# Altium PCB ESP32_pcb.PcbDoc
Units mil, origin at the board's own origin, x right, y up, seen from the top; angles counter-clockwise.
Board outline 1301 x 2153 mil, 2 copper layers (Top Layer, Bottom Layer); 45 components, 36 nets, 187 pads, 24 vias.
Unrouted connection lines stored in the file: 1.
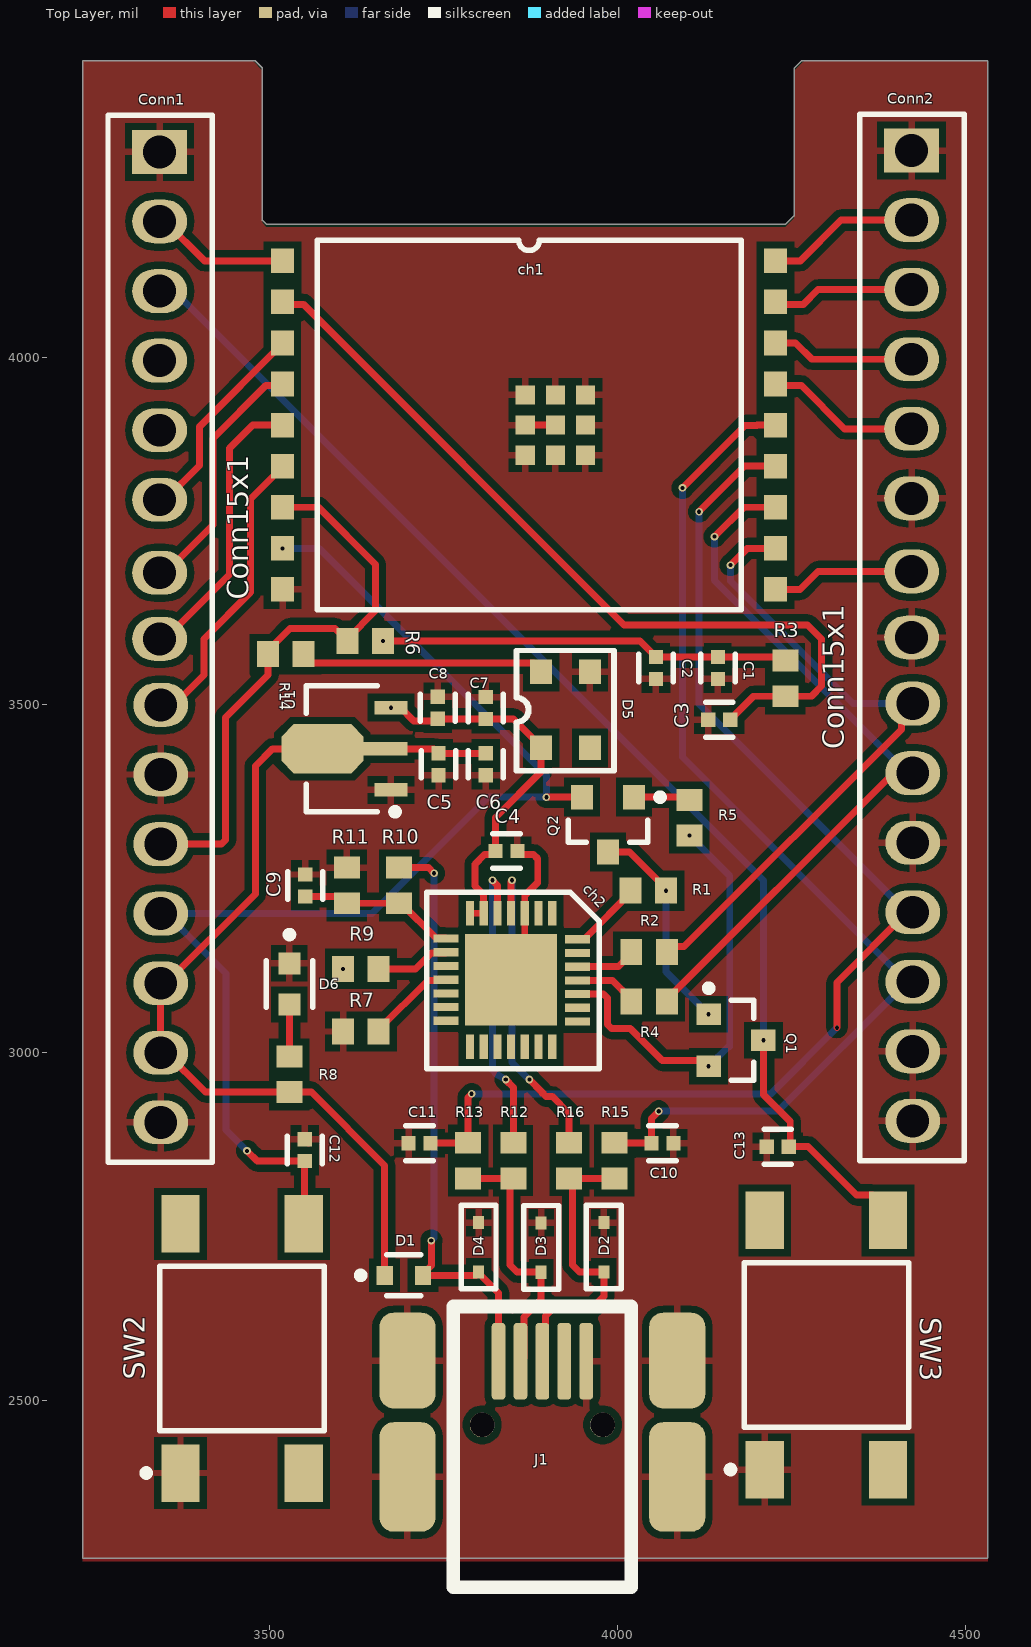
[diagram p0: Top Layer view]
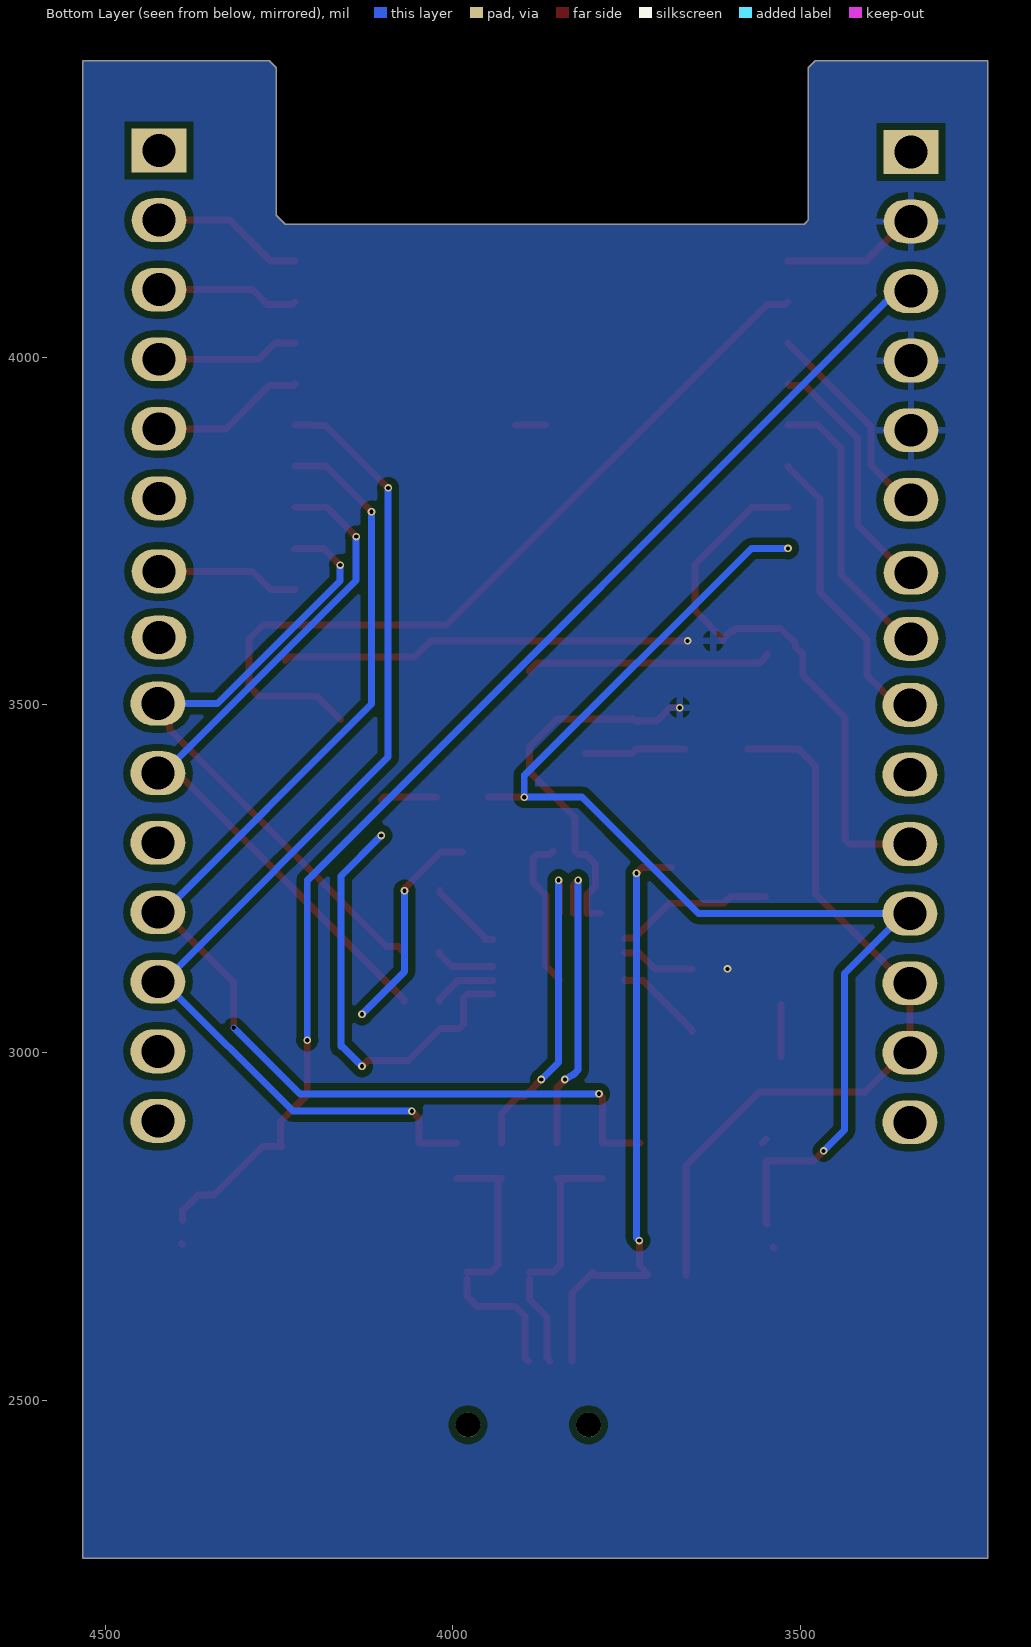
[diagram p1: Bottom Layer view, seen from below]

## Layer stack, top to bottom
Top Solder: solder mask 0.4, Solder Resist, Dk 3.5
Top Layer: signal copper 1.4
Dielectric 1: dielectric 12.6, FR-4, Dk 4.8
Bottom Layer: signal copper 1.4
Bottom Solder: solder mask 0.4, Solder Resist, Dk 3.5

## Board outline
3231,2457 3231,4426 3479,4426 3489,4416 3489,4197 3495,4191 4241,4191 4254,4204 4254,4416 4264,4426 4532,4426 4532,2273 3231,2273

## Design rules (kind name [scope] priority, off if disabled: settings)
Clearance [All] p1: gap=10 ignorepadtopadclearanceinfootprint=FALSE except(0: Arc-Arc Arc-Track Arc-SMDPad Arc-Hole Track-Track Track-SMDPad Track-Hole SMDPad-Hole THPad-Hole Via-Hole Fill-Hole Poly-Hole Region-Hole Text-Hole; 2: SMDPad-SMDPad)
HoleToHoleClearance [All] p1: gap=5 allowstackedmicrovias=TRUE
MinimumSolderMaskSliver [All] p1: minsoldermaskwidth=5
PolygonConnect [All] p1: connectstyle=Relief reliefconductorwidth=10 reliefentries=4 polygonreliefangle="90 Angle" airgapwidth=10
RoutingVias [All] p1: holewidth=6 width=11 viastyle="Through Hole" minholewidth=6 minwidth=11 maxholewidth=6 maxwidth=11
SilkToSilkClearance [All] p1: silktosilkclearance=5
SilkToSolderMaskClearance [IsPad] p1: minsilkscreentomaskgap=2 clearancetoexposedcopper=FALSE
SolderMaskExpansion [All] p1: expansion=4 istentingtop=FALSE
Width [All] p1: maxlimit=10 minlimit=10 preferedwidth=10
26 further rules are at their usual default settings.

## Components (designator, comment, footprint, x,y, rotation, side; value= is the part's Value field where it differs from the comment)
C1 "1p" FP-C0402-BB-MFG 4144,3553.18 r270 top value="0.10 μF"
C2 "1p" FP-C0402-BB-MFG 4054.96,3553.18 r270 top value="0.10 μF"
C3 "1p" FP-C0402-BB-MFG 4146,3478.8 r0 top value="0.10 μF"
C4 "1p" FP-C0402-BB-MFG 3840,3290 r0 top value="0.10 μF"
C5 "1p" FP-C0402-BB-MFG 3742.42,3414.75 r270 top value="0.10 μF"
C6 "1p" FP-C0402-BB-MFG 3810.3,3414.75 r270 top value="0.10 μF"
C7 "1p" FP-C0402-BB-MFG 3810.3,3495.62 r90 top value="0.10 μF"
C8 "1p" FP-C0402-BB-MFG 3741.42,3496 r90 top value="0.10 μF"
C9 "1p" FP-C0402-BB-MFG 3550.71,3240.54 r90 top value="0.10 μF"
C10 "1p" FP-C0402-BB-MFG 4064.25,2870 r0 top value="0.10 μF"
C11 "1p" FP-C0402-BB-MFG 3715,2870 r180 top value="0.10 μF"
C12 "1p" FP-C0402-BB-MFG 3550,2860 r270 top value="0.10 μF"
C13 "1p" FP-C0402-BB-MFG 4230,2865 r0 top value="0.10 μF"
ch1 "ESP_RF" "ESP_RF - DUPLICATE" 3872.51,3902.31 r0 top
ch2 "CP02102" ESPCHIP 3846.65,3105.04 r270 top
Conn1 "Conn15x1" CONN15X1 3342.21,3597.5 r0 top
Conn2 "Conn15x1" CONN15X1 4423.21,3599.5 r0 top
D1 "1N4148WT-" FP-SOD523-MFG 3692.44,2680 r0 top
D2 "zenerDiode" LESD5D5 3980,2720.43 r270 top
D3 "zenerDiode" LESD5D5 3890,2720 r270 top
D4 "zenerDiode" LESD5D5 3800,2720.43 r270 top
D5 "SK68XX" SD68XX 3925,3493 r90 top
D6 "LTST-C190GKT" FP-LTST-C190GKT-MFG 3528,3099 r270 top
J1 "67503-1020" MOLX-67503-1020_V 3828.62,2556.53 r90 top
Q1 "MMBTA42LT1G" ONSC-SOT-23-3-318-08_V 4170,3018 r0 top
Q2 "MMBTA42LT1G" ONSC-SOT-23-3-318-08_V 3986,3328 r270 top
R1 "1k" RESC1609X50X30NL8T20 4044,3233 r0 top
R2 "1k" RESC1609X50X30NL8T20 4045,3145 r0 top
R3 "1k" RESC1609X50X30NL8T20 4241,3538.11 r90 top
R4 "1k" RESC1609X50X30NL8T20 4045,3073.97 r0 top
R5 "1k" RESC1609X50X30NL8T20 4103,3338 r90 top
R6 "1k" RESC1609X50X30NL8T20 3637,3592.1 r0 top
R7 "1k" RESC1609X50X30NL8T20 3630.71,3030.54 r180 top
R8 "1k" RESC1609X50X30NL8T20 3528,2969 r90 top
R9 "1k" RESC1609X50X30NL8T20 3630.71,3120.54 r180 top
R10 "1k" RESC1609X50X30NL8T20 3685.71,3240.54 r270 top
R11 "1k" RESC1609X50X30NL8T20 3610.71,3240.54 r270 top
R12 "1k" RESC1609X50X30NL8T20 3850,2845 r270 top
R13 "1k" RESC1609X50X30NL8T20 3785,2845 r270 top
R14 "1k" RESC1609X50X30NL8T20 3522.66,3573 r180 top
R15 "1k" RESC1609X50X30NL8T20 3995,2845 r270 top
R16 "1k" RESC1609X50X30NL8T20 3930,2845 r270 top
SW2 "FSM4JSMA" TECO-FSM4JSMA_V 3460,2575 r180 top
SW3 "FSM4JSMA" TECO-FSM4JSMA_V 4300,2580 r180 top
U1 "L79L05ACUTR" SOT-89_L 3607,3437.01 r180 top

## Footprints (in the part's own frame and the unit in brackets; to place one, negate y for a bottom-side part, rotate by r counter-clockwise, add the part's x,y. Pads: shape width x height; smd on the part's side, far side on the other; paste and mask are expansions set on the pad)
CONN15X1 [mm]
  rect 2x1.6 hole 1.2: 1(-0.02,17.716)
  oval 2x1.6 hole 1.2: 2(-0.02,15.176) 3(-0.02,12.636) 4(-0.02,10.096) 5(-0.02,7.556) 6(-0.02,5.016) 7(-0.02,2.349) 8(-0.02,-0.064) 9(0.02,-2.476) 10(0.02,-5.016) 11(0.02,-7.556) 12(0.02,-10.096) 13(0.02,-12.636) 14(0.02,-15.176) 15(0.02,-17.716)
  silkscreen extent -1.91,-19.18 1.91,19.05, body extent -1.29,-19.11 1.25,18.99, height 3.2
"ESP_RF - DUPLICATE" [mm]
  rect 0.85x0.9 smd: 1(-9,6) 2(-9,4.5) 3(-9,3) 4(-9,1.5) 5(-9,0) 6(-9,-1.5) 7(-9,-3) 8(-9,-4.5) 9(-9,-6) 10(9,-6) 11(9,-4.5) 12(9,-3) 13(9,-1.5) 14(9,0) 15(9,1.5) 16(9,3) 17(9,4.5) 18(9,6)
  rect 0.7x0.7 smd: 19(-0.14,1.1) 20(-0.14,0) 21(-0.14,-1.1) 22(0.96,1.1) 23(0.96,0) 24(0.96,-1.1) 25(2.06,1.1) 26(2.06,0) 27(2.06,-1.1)
  silkscreen extent -7.74,-6.75 7.74,6.75, body extent -9.01,-6.72 9.01,13.28, height 3.25
ESPCHIP [mm]
  rect 0.9x0.3 smd paste+0 mask+0.02: 1(-2.426,1.5) 2(-2.426,1) 3(-2.426,0.5) 4(-2.426,0) 5(-2.426,-0.5) 6(-2.426,-1) 7(-2.426,-1.5) 15(2.451,-1.5) 16(2.451,-1) 17(2.451,-0.5) 18(2.451,0) 19(2.451,0.5) 20(2.451,1) 21(2.451,1.5)
  rect 0.3x0.9 smd paste+0 mask+0.02: 8(-1.5,-2.375) 9(-1,-2.375) 10(-0.5,-2.375) 11(0,-2.375) 12(0.5,-2.375) 13(1,-2.375) 14(1.5,-2.375) 22(1.525,2.426) 23(1.025,2.426) 24(0.525,2.426) 25(0.025,2.426) 26(-0.475,2.426) 27(-0.975,2.426) 28(-1.475,2.426)
  rect 3.35x3.35 smd paste+0 mask+0.02: 29(0,0)
  silkscreen extent -3.2,-3.07 3.25,3.23, body extent -2.51,-2.5 2.49,2.5, height 0.81
FP-C0402-BB-MFG [mm]
  rect 0.52x0.52 smd paste+0 mask+0: 1(-0.4,0) 2(0.4,0)
  silkscreen extent -0.5,-0.64 0.5,0.64, body extent -0.8,-0.4 0.8,0.4, height 0.25
FP-LTST-C190GKT-MFG [mm]
  rect 0.8x0.8 smd paste+0 mask+0: 1(-0.75,0) 2(0.75,0)
  silkscreen extent -1.92,-0.85 0.85,0.85, body extent -1.25,-0.55 1.25,0.55, height 0.25
FP-SOD523-MFG [mm]
  rect 0.6x0.7 smd paste+0 mask+0: 1(-0.7,0) 2(0.7,0)
  silkscreen extent -1.7,-0.75 0.63,0.75, body extent -1.1,-0.53 1.1,0.53, height 0.25
LESD5D5 [mm]
  rect 0.48x0.4 smd: 1(-0.9,0) 2(0.9,0)
  silkscreen extent -1.53,-0.64 1.52,0.64, body extent -1.12,-0.51 1.12,0.48, height 0.6
MOLX-67503-1020_V [mm] "Mini USB Connector, SMT, Righer Angle"
  rrect50% 2.8x0.5 smd: 1(0,0) 2(0,-0.8) 3(0,-1.6) 4(0,-2.4) 5(0,-3.2)
  rrect50% 3.5x2.05 smd: 6(0.025,3.325) 8(0.025,-6.525)
  rrect50% 4x2.05 smd: 7(-4.225,3.325) 9(-4.225,-6.525)
  round 0.9 hole 0.9 unplated: X(-2.325,-3.8) Y(-2.325,0.6)
  silkscreen extent -8.25,-4.85 2,1.65, body extent -8.22,-6.56 0.78,3.34, height 3.95
ONSC-SOT-23-3-318-08_V [mm] "SOT23, 3-Leads, Body 2.92x1.3mm, Pitch 0.95mm"
  rect 0.9x0.8 smd: 1(-1,0.95) 2(-1,-0.95) 3(1,0)
  silkscreen extent -1.12,-1.46 0.65,2.02, body extent -0.65,-1.46 0.65,1.46, height 1.11
RESC1609X50X30NL8T20 [mm] "Chip Resistor, 2-Leads, Body 1.65x0.95mm, IPC Medium Density"
  rect 0.8x0.95 smd: 1(-0.65,0) 2(0.65,0)
  body extent -0.82,-0.48 0.82,0.48, height 0.5
SD68XX [mm]
  rect 0.9x0.8 smd: 1(1.39,-0.89) 2(1.39,0.89) 3(-1.39,0.89) 4(-1.39,-0.89)
  silkscreen extent -2.23,-1.78 2.17,1.81, body extent -1.88,-1.77 1.82,1.73, height 1
SOT-89_L [mm] "SOT89, 3-Leads, Body 4.5x2.4 mm, Pitch 1.5mm, Lead Span 4.1mm, IPC High Density"
  rect 1.2x0.5 smd: 1(-1.7,1.5) 3(-1.7,-1.5)
  rect 1.6x0.5 smd: 2(-1.5,0)
  oct 3x1.8 smd: 2(0.8,0)
  silkscreen extent -1.98,-2.3 1.4,2.42, body extent -1.2,-2.3 1.4,2.3, height 1.6
TECO-FSM4JSMA_V [mm] "SMD, 4-Leads, Body 6x6mm, Pitch 4.5mm"
  rect 1.4x2.1 smd: 1(2.25,4.55) 2(2.25,-4.55) 3(-2.25,4.55) 4(-2.25,-4.55)
  silkscreen extent -3,-3 3.62,4.67, body extent -3,-5 3,5, height 5.08

## Part data
C1 C2 C3 C4 C5 C6 C7 C8 C9 C10 C11 C12 C13: library part CMP-2008-02046-2, "CAP CER 0.1UF 10V X5R 0402", Capacitance="0.10 μF", Manufacturer=Kemet, Manufacturer Part Number=C0402C104K8PACTU, Package=C0402-BB, Temperature="-55°C to +125°C", Temperature Characteristic=X5R, Temperature Coefficient=15%, Temperature Range High=+125°C, Temperature Range Low=-55°C, Tolerance=0.1, Voltage Rating="10 V", Automotive=No, Category=Cap, ComponentLink2Description=Datasheet, ComponentLink2URL=https://content.kemet.com/datasheets/KEM_C1002_X7R_SMD.pdf, Device Class L1="Passive Components", Device Class L2=Capacitors, Device Class L3="Ceramic Capacitors", Digikey Description="CAP CER 0.1UF 10V X5R 0402", Height=0.55mm, Ipc Land Pattern Name=CAPC10050X50, Lead Free=Yes, Material=Ceramic, Mouser Description="Capacitor 100 nF 10 VDC 0402", Octopart=https://octopart.com/c0402c104k8pactu-kemet-140039, RoHS=TRUE
D1: library part CMP-2000-05518-3, "DIODE GEN PURP 80V 125MA SOD523", Average Rectified Current=125mA, Capacitance=2pF, Forward Current=250mA, Forward Voltage=1.25V, Max Forward Surge Current (Ifsm)=2A, Max Operating Temperature=150°C, Max Repetitive Reverse Voltage (Vrrm)=100V, Max Reverse Voltage (DC)=80V, Min Operating Temperature=-65°C, Package Quantity=3000, Peak Reverse Current=1uA, Power Dissipation=150mW, Contact Plating=Tin, Current Rating=125mA, Element Configuration=Single, Height=0.65mm, Lead Free="Lead Free", Length=0.9mm, Max Surge Current=2A, Mount="Surface Mount", Number of Pins=2, Output Current=125mA, Packaging="Tape and Reel", Peak Non-Repetitive Surge Current=2A, Polarity=Standard, Power Rating=150mW, Radiation Hardening=No, REACH SVHC="No SVHC", Recovery Time=4ns, Reverse Recovery Time=4ns, Voltage Rating (DC)=80V, Weight=3.5E-05oz, Width=1.3mm
D6: library part CMP-22017-000005-2, "LED GREEN CLEAR CHIP SMD", Case Code (Imperial)=0603, Case Code (Metric)=1608, Color=Green, Forward Current=30mA, Forward Voltage=2.1V, Lens Color=Colorless, Max Operating Temperature=85°C, Min Operating Temperature=-55°C, Package Quantity=1, Power Dissipation=100mW, Reverse Voltage=5V, Test Current=10mA, Voltage=2V, Case/Package=0603, Depth=0.8mm, Dominant Wavelength=569nm, Height=0.8mm, Illumination Color=Green, Lead Free="Lead Free", Length=1.6mm, Lens Style=Clear, Lens Transparency=Clear, Luminous Intensity=6mcd, Mount="Surface Mount", Number of Elements=1, Number of LEDs=1, Number of Pins=2, Packaging="Tape and Reel", Power Rating=100mW, Radiation Hardening=No, Viewing Angle=130°, Wavelength=565nm, Width=0.8mm
J1: library part CMP-0411-00002-1, "USB, MINI, SMD, RA KME04-USBMU03A01", Manufacturer=Molex, ComponentLink1Description="Manufacturer URL", ComponentLink1URL=http://www.molex.com/, ComponentLink2Description=Datasheet, ComponentLink2URL=http://www.molex.com/pdm_docs/sd/675031020_sd.pdf, DatasheetVersion="Rev F, 06/2009", Mounting Technology="Surface Mount", PackageDescription="Mini USB Connector, SMT, Righer Angle", PackageReference=67503-1020, PartNumber=67503-1020, Terminal Pitch="0.8 mm"
Q1 Q2: library part CMP-1048-00662-1, "High Voltage Transistor, NPN Silicon, 3-Pin SOT-23, Pb-Free, Tape and Reel", Manufacturer="On Semiconductor", ComponentLink1Description="Manufacturer URL", ComponentLink1URL=http://www.onsemi.com/, ComponentLink2Description=Datasheet, ComponentLink2URL=http://www.onsemi.cn/pub_link/Collateral/MMBTA42LT1-D.PDF, ComponentLink3Description="Package Specification", ComponentLink3URL=http://www.onsemi.cn/pub_link/Collateral/318-08.PDF, DatasheetVersion="Rev. 12", fT Min (MHz)=50, IC Continuous (A)=0.5, Mounting Technology="Surface Mount", PackageDescription="3-Pin Small Outline Transistor, Body 2.92 x 1.3 mm, Pitch 0.95 mm", PackageReference=SOT-23-3-318-08, PackageVersion="Rev. AP, 11/2009", Packing="Tape and Reel", PartNumber=MMBTA42LT1G, Polarity=NPN, RoHS=TRUE
R1 R2 R3 R4 R5 R6 R7 R8 R9 R10 R11 R12 R13 R14 R15 R16: library part CMP-2000-03816-5, "Chip Resistor, 0 Ohm, Jumper, 100 mW, -55 to 155 degC, 0603 (1608 Metric), RoHS, Tape and Reel", Manufacturer="Vishay Semiconductor", Max Operating Temperature="155 degC", Min Operating Temperature="-55 degC", Package Quantity=5000, Voltage Rating="75 V", ComponentLink1Description="Manufacturer URL", ComponentLink1URL=http://www.vishay.com/, ComponentLink2Description=Datasheet, ComponentLink2URL=http://www.vishay.com/docs/20035/dcrcwe3.pdf, DatasheetVersion=06/2012, Height="0.45 mm", Length="1.55 mm", Mount="Surface Mount", Mounting Technology="Surface Mount", PackageDescription="2-Pin Surface Mount Device, Body 1.575 x 0.85 mm", PackageReference=0603, Packaging="Tape and Reel", Pins=2, REACH SVHC=Unknown, RoHSCompliant=true
SW2 SW3: library part CMP-2000-05602-2, "Swicth, SPST, 24 V, -35 to 85 degC, 4-Pin SMD, RoHS, Tape and Reel", Case\/Package=SMD/SMT, Contact Current Rating=50mA, Contact Resistance=100mOhm, Manufacturer="TE Connectivity", Max Operating Temperature=85degC, Max Voltage Rating (DC)=12V, Min Operating Temperature=-35degC, Operating Force=1.57N, Package Description="4-Pin Surface Mount Device, Body 6 x 6 mm, Pitch 4.5 mm", Package Quantity=750, Voltage Rating=24V, Actuator Length=0.055inch, Actuator Material=Polyamide, Contact Material=CopperAlloy, Contact Plating=Silver, Current Rating=50mA, Datasheet URL=http://www.te.com/commerce/DocumentDelivery/DDEController?Action=showdoc&DocId=Customer+Drawing%7F2-1437565-7%7FV%7Fpdf%7FEnglish%7FENG_CD_2-1437565-7_V.pdf%7F4-1437565-2, Datasheet Version="Rev. V, 02/2015", Electrical Life=100000Cycles, Illumination Type=Illuminated, Length=6mm, Manufacturer URL=http://www.te.com/, Mechanical Life=100000Cycles, Mount=SurfaceMount, Mounting Technology=SurfaceMount, Orientation=Straight, Package Reference=FSM4JSMA, Packaging=LoosePiece, REACH SVHC=Unknown, RoHSCompliant=true, Switch Travel=0.25mm, Termination=GullWing, Throw Configuration=SPST, Voltage Rating (DC)=24V, Width=6mm
U1: library part CMP-0244-00395-1, "Negative Voltage Regulator, -5V, 4-Pin SOT-89, Tape and Reel", ComponentLink1Description="Manufacturer URL", ComponentLink1URL=http://www.st.com, ComponentLink2Description=Datasheet, ComponentLink2URL=http://www.st.com/internet/com/TECHNICAL_RESOURCES/TECHNICAL_LITERATURE/DATASHEET/CD00000539.pdf, DatasheetVersion=1/07/2009, PackageDescription="3-Pin SOT-89 Package 1.5 mm Pitch, 4.1 mm Lead Span", PackageReference=SOT-89, PackageVersion=2011

## Via types
v1: diameter 11, hole 6, Top Layer to Bottom Layer, 23 vias
v2: diameter 6, hole 6, Top Layer to Bottom Layer, 1 vias

## Nets (pads, with @x,y where several pads share a name; then routed paths per layer and width w, separated by ;. In a path a pad name is that pad's centre, name@x,y a point inside that pad or via, vN(x,y) a via of type N, cw(c..) or ccw(c..) an arc to the next point about the centre after c; other vN are vias at no path point)
NetC1_1: C1.1 C2.1 C4.1 C7.1 C8.1 ch1.1 ch2.6 ch2.7 Conn1.2 Conn1.4 Conn1.5 D5.3 R3.2 R6.2 R9.2 U1.3 | length 1342
  Top Layer w10: Conn1.2 3349.3,4195 3405.77,4138.53 ch1.1 ; v1(3662.59,3592.1) 4031.79,3592.1 C2.1 C1.1 4235.78,3568.93 R3.2 ; v1(3673.93,3496.06) 3687.71,3496.06 3706.76,3477 3738.17,3477 C8.1 3741.61,3480.06 3810.12,3480.06 C7.1 3850.33,3479.88 3889.96,3440.24 D5.3 3889.96,3403.96 3824.25,3338.25 C4.1 3819.02,3284.76 3808.76,3284.76 3795,3271 3795,3240 3807.28,3227.72 ch2.6 ch2.7
  other v1: 3605.12,3120.54
NetC1_2: C1.2 C2.2 C3.1 C4.2 C5.2 C6.2 C7.2 C8.2 C9.2 C10.2 C11.2 C12.1 C13.1 ch1.9 ch1.19 ch1.20 ch1.21 ch1.22 ch1.23 ch1.24 ch1.25 ch1.26 ch1.27 ch2.3 ch2.29 Conn1.1 Conn1.10 Conn1.15 Conn2.1 Conn2.6 Conn2.8 Conn2.11 Conn2.14 Conn2.15 D2.1 D3.1 D4.1 D5.1 D6.1 J1.5 J1.6 J1.7 J1.8 J1.9 R7.2 R11.1 SW2.1 SW3.1 U1.1 | length 275
  Top Layer w10: C12.1 C12.1@3555.75,2870 ; ch2.29 3866.34,3124.72 ch2.3 3866.34,3226.34 3885,3245 3885,3278.91 3879.14,3284.76 3860.98,3284.76 C4.2 ; ch1.20 ch1.23
NetC3_2: C3.2 ch1.2 R3.1 | length 1194.7
  Top Layer w10: ch1.2 3521.65,4076 3548,4076 4009,3615 4273,3615 4293,3595 4293,3527 4278.52,3512.52 R3.1 4195.47,3512.52 C3.2
NetC5_1: C5.1 C6.1 Conn1.13 Conn1.14 D1.1 R8.1 U1.2 | length 1273.8
  Top Layer w10: U1.2@3575.5,3437 3504,3437 3479,3412 3479,3228.13 3350.87,3100 Conn1.13 Conn1.14 3350.87,3000 3407.46,2943.41 3559.59,2943.41 3664.88,2838.12 D1.1 ; U1.2@3666.06,3437 3735.92,3437 C5.1 C6.1
NetC9_1: C9.1 ch2.8 R10.2 R11.2 | length 227.6
  Top Layer w10: C9.1 3600.86,3224.79 R11.2 R10.2 3688.66,3214.95 3738.61,3165 3752.24,3165 ch2.8
NetC10_1: C10.1 ch1.14 Conn2.13 R15.1 | length 1562.7
  Top Layer w10: R15.1 3995.59,2870 C10.1 4048.5,2905.5 v1(4059,2916) ; v1(4093,3812) 4183,3902 4200,3902 4200.31,3902.31 ch1.14
  Bottom Layer w10: v1(4059,2916) 4230.14,2916 Conn2.13@4416.14,3102 ; v1(4093,3812) 4093,3425.13 Conn2.13@4416.13,3102 ; Conn2.13@4423,3103 Conn2.13@4424,3104 ; Conn2.13 Conn2.13@4416.14,3102
NetC11_1: C11.1 ch1.13 Conn2.12 R13.1 | length 1777.1
  Top Layer w10: C11.1 3784.41,2870 R13.1 3785,2936 v1(3790,2941) ; v1(4117,3777.84) 4182.41,3843.25 ch1.13 ; v2(4315,3036) 4315,3100.87 4416.13,3202 Conn2.12
  Bottom Layer w10: v1@3790.27,2941 4220,2941 v2@4314.71,3035.71 ; v1(4117,3777.84) 4117,3501.13 4416.13,3202 Conn2.12 4424,3184 Conn2.12@4418.24,3178.24
NetC12_2: C12.2 ch1.8 Conn1.12 Q2.2 SW2.4 | length 1791.5
  Top Layer w10: v1(3467,2859) 3481.75,2844.25 C12.2 3550,2755.55 SW2.4 ; SW2.4@3538.58,2719.13 SW2.4@3540,2720.55 ; v1(3897.37,3367.37) Q2.2
  Bottom Layer w10: Conn1.12 Conn1.12@3350.87,3200 ; v1(3467,2859) 3437,2889 3437,3113.87 Conn1.12@3350.87,3200 ; v1(3518.18,3725.14) 3570.86,3725.14 3897.37,3398.63 v1(3897.37,3367.37) 3814.37,3367.37 3647,3200 Conn1.12@3350.87,3200
NetC13_2: C13.2 Conn1.3 Q1.3 SW3.4 | length 1815.3
  Top Layer w10: v1(4209.37,3018) 4209.37,2939.63 4248,2901 4248,2867.25 C13.2 4273.74,2865 4343.27,2795.47 4366.02,2795.47 4388.58,2772.91 SW3.4 ; SW3.4@4388.58,2724.13 SW3.4@4390,2725.55
  Bottom Layer w10: Conn1.3 3362,4095 4209.37,3247.63 v1(4209.37,3018)
Netch1_3: ch1.3 Conn1.6 | length 303.2
  Top Layer w10: Conn1.6 3349.3,3795 3398.72,3844.42 3398.72,3899.97 3518.18,4019.43 ch1.3
Netch1_4: ch1.4 Conn1.7 | length 362
  Top Layer w10: Conn1.7 3349.3,3690 3418,3758.7 3418,3883 3494,3959 3515.82,3959 ch1.4
Netch1_5: ch1.5 Conn1.8 | length 410.2
  Top Layer w10: Conn1.8 3349.3,3595 3442,3687.7 3442,3869 3475.31,3902.31 ch1.5
Netch1_6: ch1.6 Conn1.9 | length 426.9
  Top Layer w10: Conn1.9 3362,3500 3405,3543 3405,3595 3472,3662 3472,3796.09 3518.18,3842.27 ch1.6
Netch1_7: ch1.7 Conn1.11 R6.1 R14.2 | length 821.4
  Top Layer w10: Conn1.11 3430.14,3300 3436,3305.86 3436,3482 3497.07,3543.07 R14.2 3507.82,3583.75 3507.82,3588.96 3528.86,3610 3593.51,3610 3597.71,3605.8 3600.66,3605.8 R6.1@3611.41,3595.05 ; ch1.7 3569.8,3784.2 3652,3702 3652,3635.64 R6.1@3611.41,3595.05 ; R6.1 R6.1@3611.41,3595.05
Netch1_10: ch1.10 Conn2.7 | length 214.3
  Top Layer w10: ch1.10 4226.93,3666 4262,3666 4288,3692 Conn2.7 ; Conn2.7@4414.55,3694 Conn2.7@4422.43,3694
Netch1_11: ch1.11 Conn2.9 R2.2 | length 955.7
  Top Layer w10: R2.2 4078.07,3152.48 4095.48,3152.48 4407.69,3464.69 4407.69,3485.69 Conn2.9 Conn2.9@4416.13,3502 ; v1(4162,3701) 4186.14,3725.14 ch1.11 ch1.11@4227.98,3724
  Bottom Layer w10: v1(4162,3701) 4162,3678.14 4338.14,3502 Conn2.9
Netch1_12: ch1.12 Conn2.10 R4.2 | length 1059.8
  Top Layer w10: R4.2 4070.59,3076.92 4387.53,3393.86 4413.86,3393.86 Conn2.10@4424,3404 ; v1(4139,3742) 4181.2,3784.2 ch1.12
  Bottom Layer w10: v1(4139,3742) 4139,3679.13 4416.13,3402 Conn2.10
Netch1_15: ch1.15 Conn2.5 | length 230.1
  Top Layer w10: ch1.15 4229.2,3959 4264,3959 4326,3897 Conn2.5 ; Conn2.5@4414.55,3899 Conn2.5@4422.43,3899
Netch1_16: ch1.16 Conn2.4 | length 213.2
  Top Layer w10: ch1.16 4255.58,4020.42 4279,3997 Conn2.4 ; Conn2.4@4414.55,3999 Conn2.4@4422.43,3999
Netch1_17: ch1.17 Conn2.3 | length 205.7
  Top Layer w10: ch1.17 4230.31,4076 4267,4076 4288,4097 Conn2.3
Netch1_18: ch1.18 Conn2.2 | length 221.8
  Top Layer w10: ch1.18 4262.53,4138.53 4321,4197 Conn2.2 ; Conn2.2@4420.46,4199 Conn2.2@4422.43,4199
Netch2_4: ch2.4 R16.1 | length 465
  Top Layer w10: ch2.4 3846.65,3246.38 3848,3247.73 v1(3848,3248) ; v1(3873,2961.5) 3890.78,2943.72 3890.78,2943.22 3897.1,2936.9 3906.1,2936.9 3930,2913 R16.1
  Bottom Layer w10: v1(3848,3248) 3848,2986 3858.17,2975.83 3858.4,2975.83 3872.73,2961.5 v1(3873,2961.5)
Netch2_5: ch2.5 R12.1 | length 442.3
  Top Layer w10: v1(3820,3248) 3820,3247.73 3826.97,3240.76 ch2.5 ; v1(3839,2961.5) 3839,2961.23 3850,2950.23 R12.1
  Bottom Layer w10: v1(3820,3248) 3820,2979.14 3820,2975 3825.86,2969.14 v1(3839,2961.5)
Netch2_9: ch2.9 R9.1 | length 106.7
  Top Layer w10: R9.1 3709.54,3120.54 3732.5,3143.5 3752.24,3143.5 ch2.9
Netch2_11: ch2.11 R7.1 | length 129.4
  Top Layer w10: R7.1 3656.3,3033.49 3726.93,3104.13 3752.24,3104.13 ch2.11
Netch2_24: ch2.24 Q1.2 R5.1 | length 623.1
  Top Layer w10: ch2.24 3979.14,3084.35 3985,3078.49 3985,3040.86 3990.86,3035 4018,3035 4064,2989 4122.23,2989 v1(4130.63,2980.6)
  Bottom Layer w10: v1(4103,3312.41) 4161,3254.41 4161,3009 4159.03,3009 v1(4130.63,2980.6)
Netch2_25: ch2.25 R4.1 | length 91.4
  Top Layer w10: ch2.25 3992.29,3104.04 4019.41,3076.92 R4.1
Netch2_26: ch2.26 R2.1 | length 87.8
  Top Layer w10: ch2.26 4001.08,3123.72 4019.41,3142.05 R2.1
Netch2_28: ch2.28 R1.1 | length 108.4
  Top Layer w10: ch2.28 3953.97,3163.09 3954.87,3164 3954.87,3166.51 4018.41,3230.05 R1.1
NetD1_2: D1.2 D4.2 J1.1 R10.1 | length 861.3
  Top Layer w10: R10.1 3727.87,3266.13 v1(3736,3258) ; v1@3732,2729.73 3732,2693.97 3720,2681.97 D1.2 3796.57,2680 3797.5,2680.93 3797.5,2682.5 D4.2 3800,2683.43 3828.62,2654.8 J1.1
  Bottom Layer w10: v1(3732,2730) 3736,2734 v1(3736,3258)
NetD2_2: D2.2 J1.3 R15.2 R16.2 | length 427.5
  Top Layer w10: J1.3 3896.46,2561.38 3896.46,2621.46 3910,2635 3965,2635 3980,2650 3980,2674.57 ; D2.2 3945,2685 3935,2695 3935,2814.41 R16.2 R15.2
NetD3_2: D3.2 J1.2 R12.2 R13.2 | length 371.2
  Top Layer w10: R13.2 R12.2 3845,2814.41 3845,2695 3855.43,2684.57 D3.2 ; J1.2 3864.96,2561.38 3864.96,2619.96 3890,2645 3890,2674.57
NetD5_2: D5.2 R14.1 | length 354.4
  Top Layer w10: R14.1 3548.25,3570.75 3559,3560 3879.21,3560 3889.96,3549.25 D5.2
NetD6_2: D6.2 R8.2 | length 74.9
  Top Layer w10: R8.2 D6.2
NetQ1_1: Q1.1 Q2.3 R1.2 | length 311.2
  Top Layer w10: Q2.3 4016.91,3288.63 4069.59,3235.95 v1(4069.59,3233)
  Bottom Layer w10: v1(4069.59,3233) 4069.59,3116.44 v1(4130.63,3055.4)
NetQ2_1: Q2.1 R5.2 | length 81.2
  Top Layer w10: Q2.1 4099.22,3367.37 R5.2
pads on no net: ch2.1 ch2.2 ch2.10 ch2.12 ch2.13 ch2.14 ch2.15 ch2.16 ch2.17 ch2.18 ch2.19 ch2.20 ch2.21 ch2.22 ch2.23 ch2.27 D5.4 J1.4 J1.X J1.Y SW2.2 SW2.3 SW3.2 SW3.3

## Polygon pours and split planes (outlines as drawn)
NetC1_1 on Bottom Layer "NONET_L-01_P-001" (solid, pour order 0): 3231,4426 3479,4426 3489,4416 3489,4197 3495,4191 4241,4191 4254,4204 4254,4416 4264,4426 4532,4426 4532,2273 3231,2273
NetC1_2 on Top Layer "NONET_L-01_P-001" (solid, pour order 1): 3231,4426 3475,4426 3489,4412 3489,4193 3495,4187 4241,4187 4254,4200 4254,4412 4268,4426 4532,4426 4532,2269 3231,2269

## Silkscreen, mask and mechanical layers (free items; w line width, h text height)
Mechanical 1:
  the board outline again, w7.87